# Altium PCB XEM7310_Berakout.PcbDoc (part 3 of 3)
Units mil, origin at the board's own origin, x right, y up, seen from the top; angles counter-clockwise.
Board outline 5980 x 6510 mil, 4 copper layers (Top, Ground Plane, Power Plane, Bottom), stack 61.496 mil thick; 68 components, 204 nets, 832 pads, 382 vias.
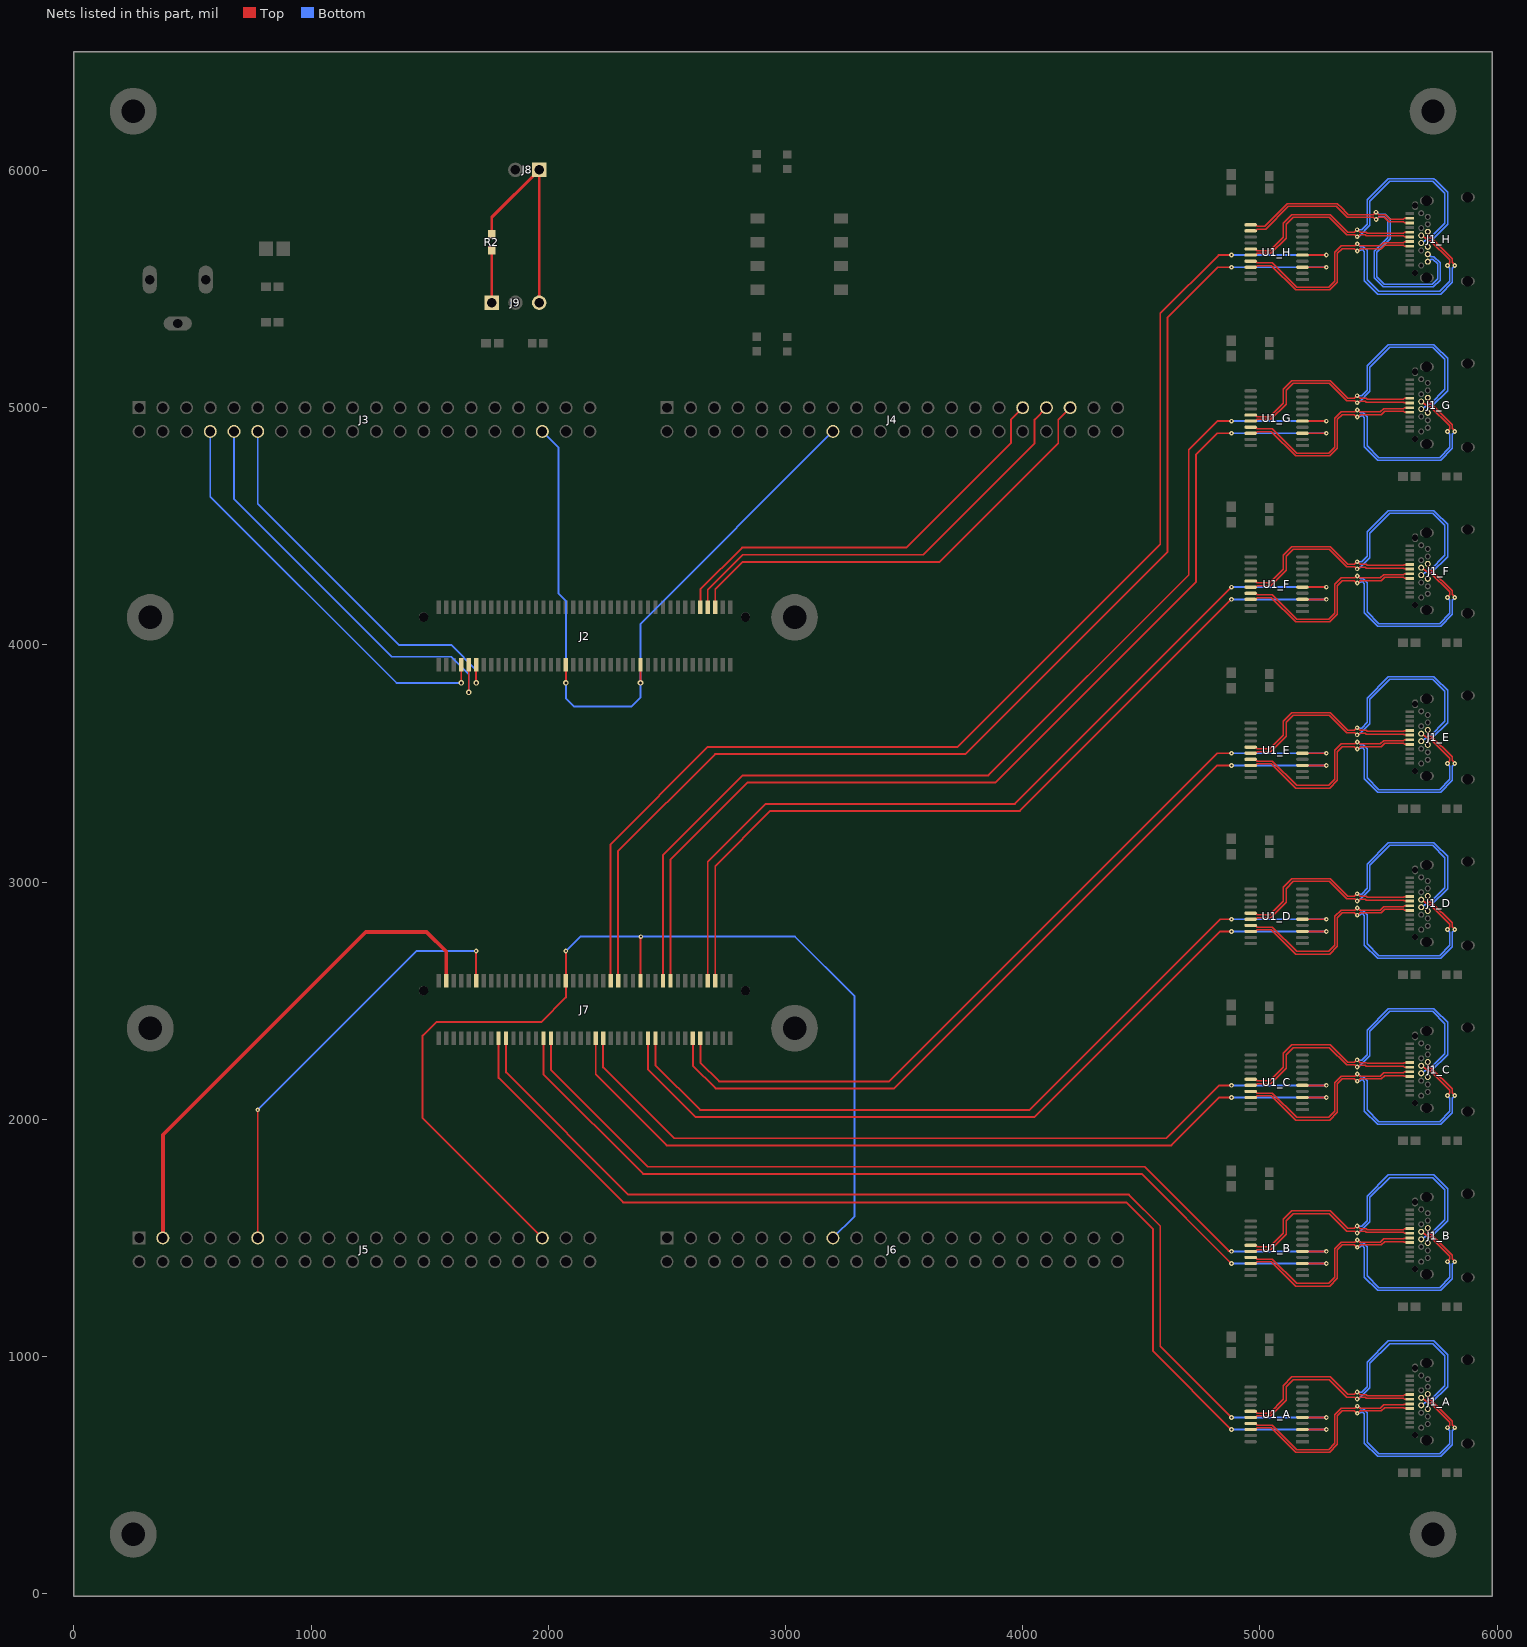
[diagram p5: the nets of this part, all layers, seen from the top]

## Via types
v1: diameter 20, hole 8, Top to Bottom, 190 vias
v2: diameter 24, hole 12, Top to Bottom, 154 vias
v3: diameter 32, hole 16, Top to Bottom, 38 vias

## Nets (pads, with @x,y where several pads share a name; then routed paths per layer and width w, separated by ;. In a path a pad name is that pad's centre, name@x,y a point inside that pad or via, vN(x,y) a via of type N, cw(c..) or ccw(c..) an arc to the next point about the centre after c; other vN are vias at no path point) (continued)
MISO_H_N: J1_H.A11 J1_H.B11 U1_H.11 | length 1487.1
  Top w6.3: U1_H.11@4960.73,5771.27 4982.63,5771.27 4989.78,5764.13 5020.19,5764.13 5115.79,5859.72 5326.69,5859.72 5333.31,5853.1 5337.99,5848.42 5372.41,5814 5477.47,5814 5487.86,5824.39 v1(5489.46,5824.39) ; v1@5490,5822.39 5493.17,5822.39 5501.51,5814.04 5528.65,5814.04 5548.3,5794.39 5605.67,5794.39 5609.24,5797.95 5631.77,5797.95 J1_H.A11@5632.4,5798.58
  Bottom w6.3: v1(5489.46,5824.39) 5491.17,5824.39 v1@5493.17,5822.39 ; v1@5489.48,5823.09 5494.04,5823.09 5501.34,5815.79 5528.1,5815.79 5549.5,5794.39 5549.5,5712.26 5493.17,5655.92 5493.17,5551.52 5524.16,5520.53 5726.6,5520.53 5748.7,5542.63 5748.7,5605.88 5728.97,5625.61 5722.89,5625.61 5712.8,5615.51 J1_H.B11@5707.6,5615.51
MISO_H_P: J1_H.A10 J1_H.B10 U1_H.12 | length 1520.6
  Top w6.3: U1_H.12@4960.73,5745.68 4982.63,5745.68 4989.78,5752.83 5024.87,5752.83 5120.47,5848.42 5322.01,5848.42 5367.73,5802.7 5478.41,5802.7 5487.21,5793.9 v1(5490.11,5793.9) ; v1@5490.2,5794.39 5493.17,5794.39 5501.51,5802.74 5523.96,5802.74 5543.62,5783.09 5605.67,5783.09 5609.24,5779.53 5631.77,5779.53 J1_H.A10@5632.4,5778.9
  Bottom w6.3: v1(5490.11,5793.9) 5491.71,5793.9 5502.3,5804.49 5523.42,5804.49 5538.2,5789.71 5538.2,5716.94 5481.86,5660.6 5481.86,5546.84 5519.47,5509.23 5731.28,5509.23 5760,5537.95 5760,5610.56 5733.65,5636.91 5722.89,5636.91 5712.8,5647.01 J1_H.B10@5707.6,5647.01
MOSI_A: J7.20 U1_A.5 | length 4601.3
  Top w8: J7.20@1821.93,2341.02 1821.93,2198.07 2337.01,1682.99 4447.24,1682.99 4580,1550.24 4580,1043.32 v1(4880,743.32) ; U1_A.5@5179.27,743.32 v1(5280,743.32)
  Bottom w8: v1(4880,743.32) v1(5280,743.32)
MOSI_A_N: J1_A.A8 J1_A.B8 U1_A.15 | length 1641.2
  Top w6.3: U1_A.15@4960.73,768.91 4982.63,768.91 4989.78,761.77 5041.12,761.77 5098.7,819.35 5098.7,877.67 5135.07,914.04 5297.54,914.04 5371.28,840.3 5396.83,840.3 5407.29,850.76 5412.77,850.76 5424.03,839.49 5448.65,839.49 5452.8,835.34 5605.67,835.34 5609.24,838.9 5631.77,838.9 J1_A.A8@5632.4,839.53
  Bottom w6.3: v1(5410,850.76) 5411.15,849.6 5428.45,849.6 5452.01,873.15 5452.01,976.13 5541.86,1065.99 5733.65,1065.99 5741.64,1057.99 5791.3,1008.33 5791.3,872.52 5723.03,804.25 5713.77,804.25 5706.59,797.06 5706.59,779.51 J1_A.B8@5707.6,778.5
MOSI_A_P: J1_A.A7 J1_A.B7 U1_A.16 | length 1621.5
  Top w6.3: U1_A.16@4960.73,743.32 4982.63,743.32 4989.78,750.46 5045.8,750.46 5110,814.66 5110,872.99 5139.75,902.74 5292.86,902.74 5366.6,829 5399.01,829 5407.26,820.76 5413.73,820.76 5419.16,826.18 5419.51,826.18 5421.51,828.19 5443.96,828.19 5448.12,824.03 5605.67,824.03 5609.24,820.47 5631.77,820.47 J1_A.A7@5632.4,819.84
  Bottom w6.3: v1(5410.03,820.76) 5413.73,820.76 5418.67,825.69 5420.53,825.69 5463.31,868.47 5463.31,971.45 5546.54,1054.68 5728.97,1054.68 5780,1003.65 5780,877.2 5718.35,815.55 5709.09,815.55 5697.99,804.45 5695.46,804.45 5685.26,794.25 J1_A.B7@5680.04,794.25
MOSI_B: J7.32 U1_B.5 | length 3819
  Top w8: J7.32@2010.91,2341.02 2010.91,2209.09 2420,1800 4513.9,1800 4868.28,1445.62 4877.7,1445.62 v1(4880,1443.32) ; U1_B.5@5179.27,1443.32 v1(5280,1443.32)
  Bottom w8: v1(4880,1443.32) v1(5280,1443.32)
MOSI_B_N: J1_B.A8 J1_B.B8 U1_B.15 | length 1641.2
  Top w6.3: U1_B.15@4960.73,1468.91 4982.63,1468.91 4989.78,1461.77 5041.12,1461.77 5098.7,1519.35 5098.7,1577.67 5135.07,1614.04 5297.54,1614.04 5371.28,1540.3 5396.83,1540.3 5407.29,1550.76 5412.77,1550.76 5424.03,1539.49 5448.65,1539.49 5452.8,1535.34 5605.67,1535.34 5609.24,1538.9 5631.77,1538.9 J1_B.A8@5632.4,1539.53
  Bottom w6.3: v1(5410,1550.76) 5411.15,1549.6 5428.45,1549.6 5452.01,1573.15 5452.01,1676.13 5541.86,1765.99 5733.65,1765.99 5741.64,1757.99 5791.3,1708.33 5791.3,1572.52 5723.03,1504.25 5713.77,1504.25 5706.59,1497.06 5706.59,1479.51 J1_B.B8@5707.6,1478.5
MOSI_B_P: J1_B.A7 J1_B.B7 U1_B.16 | length 1621.5
  Top w6.3: U1_B.16@4960.73,1443.32 4982.63,1443.32 4989.78,1450.46 5045.8,1450.46 5110,1514.66 5110,1572.99 5139.75,1602.74 5292.86,1602.74 5366.6,1529 5399.01,1529 5407.26,1520.76 5413.73,1520.76 5419.16,1526.18 5419.51,1526.18 5421.51,1528.19 5443.96,1528.19 5448.12,1524.03 5605.67,1524.03 5609.24,1520.47 5631.77,1520.47 J1_B.A7@5632.4,1519.84
  Bottom w6.3: v1(5410.03,1520.76) 5413.73,1520.76 5418.67,1525.69 5420.53,1525.69 5463.31,1568.47 5463.31,1671.45 5546.54,1754.68 5728.97,1754.68 5780,1703.65 5780,1577.2 5718.35,1515.55 5709.09,1515.55 5697.99,1504.45 5695.46,1504.45 5685.26,1494.25 J1_B.B7@5680.04,1494.25
MOSI_C: J7.46 U1_C.5 | length 3488
  Top w8: J7.46@2231.38,2341.02 2231.38,2218.62 2530,1920 4605.73,1920 4829.05,2143.32 v1(4880,2143.32) ; U1_C.5@5179.27,2143.32 v1(5280,2143.32)
  Bottom w8: v1(4880,2143.32) v1(5280,2143.32)
MOSI_C_N: J1_C.A8 J1_C.B8 U1_C.15 | length 1641.2
  Top w6.3: U1_C.15@4960.73,2168.91 4982.63,2168.91 4989.78,2161.77 5041.12,2161.77 5098.7,2219.35 5098.7,2277.67 5135.07,2314.04 5297.54,2314.04 5371.28,2240.3 5396.83,2240.3 5407.29,2250.76 5412.77,2250.76 5424.03,2239.49 5448.65,2239.49 5452.8,2235.34 5605.67,2235.34 5609.24,2238.9 5631.77,2238.9 J1_C.A8@5632.4,2239.53
  Bottom w6.3: v1(5410,2250.76) 5411.15,2249.6 5428.45,2249.6 5452.01,2273.15 5452.01,2376.13 5541.86,2465.99 5733.65,2465.99 5741.64,2457.99 5791.3,2408.33 5791.3,2272.52 5723.03,2204.25 5713.77,2204.25 5706.59,2197.06 5706.59,2179.51 J1_C.B8@5707.6,2178.5
MOSI_C_P: J1_C.A7 J1_C.B7 U1_C.16 | length 1621.5
  Top w6.3: U1_C.16@4960.73,2143.32 4982.63,2143.32 4989.78,2150.46 5045.8,2150.46 5110,2214.66 5110,2272.99 5139.75,2302.74 5292.86,2302.74 5366.6,2229 5399.01,2229 5407.26,2220.76 5413.73,2220.76 5419.16,2226.18 5419.51,2226.18 5421.51,2228.19 5443.96,2228.19 5448.12,2224.03 5605.67,2224.03 5609.24,2220.47 5631.77,2220.47 J1_C.A7@5632.4,2219.84
  Bottom w6.3: v1(5410.03,2220.76) 5413.73,2220.76 5418.67,2225.69 5420.53,2225.69 5463.31,2268.47 5463.31,2371.45 5546.54,2454.68 5728.97,2454.68 5780,2403.65 5780,2277.2 5718.35,2215.55 5709.09,2215.55 5697.99,2204.45 5695.46,2204.45 5685.26,2194.25 J1_C.B7@5680.04,2194.25
MOSI_D: J7.60 U1_D.5 | length 3452.4
  Top w8: J7.60@2451.85,2341.02 2451.85,2228.15 2640,2040 4028.78,2040 4832.1,2843.32 v1(4880,2843.32) ; U1_D.5@5179.27,2843.32 v1(5280,2843.32)
  Bottom w8: v1(4880,2843.32) v1(5280,2843.32)
MOSI_D_N: J1_D.A8 J1_D.B8 U1_D.15 | length 1641.2
  Top w6.3: U1_D.15@4960.73,2868.91 4982.63,2868.91 4989.78,2861.77 5041.12,2861.77 5098.7,2919.35 5098.7,2977.67 5135.07,3014.04 5297.54,3014.04 5371.28,2940.3 5396.83,2940.3 5407.29,2950.76 5412.77,2950.76 5424.03,2939.49 5448.65,2939.49 5452.8,2935.34 5605.67,2935.34 5609.24,2938.9 5631.77,2938.9 J1_D.A8@5632.4,2939.53
  Bottom w6.3: v1(5410,2950.76) 5411.15,2949.6 5428.45,2949.6 5452.01,2973.15 5452.01,3076.13 5541.86,3165.99 5733.65,3165.99 5741.64,3157.99 5791.3,3108.33 5791.3,2972.52 5723.03,2904.25 5713.77,2904.25 5706.59,2897.06 5706.59,2879.51 J1_D.B8@5707.6,2878.5
MOSI_D_P: J1_D.A7 J1_D.B7 U1_D.16 | length 1621.5
  Top w6.3: U1_D.16@4960.73,2843.32 4982.63,2843.32 4989.78,2850.46 5045.8,2850.46 5110,2914.66 5110,2972.99 5139.75,3002.74 5292.86,3002.74 5366.6,2929 5399.01,2929 5407.26,2920.76 5413.73,2920.76 5419.16,2926.18 5419.51,2926.18 5421.51,2928.19 5443.96,2928.19 5448.12,2924.03 5605.67,2924.03 5609.24,2920.47 5631.77,2920.47 J1_D.A7@5632.4,2919.84
  Bottom w6.3: v1(5410.03,2920.76) 5413.73,2920.76 5418.67,2925.69 5420.53,2925.69 5463.31,2968.47 5463.31,3071.45 5546.54,3154.68 5728.97,3154.68 5780,3103.65 5780,2977.2 5718.35,2915.55 5709.09,2915.55 5697.99,2904.45 5695.46,2904.45 5685.26,2894.25 J1_D.B7@5680.04,2894.25
MOSI_E: J7.72 U1_E.5 | length 3447.5
  Top w8: J7.72@2640.83,2341.02 2640.83,2239.17 2720,2160 3436.8,2160 4820.12,3543.32 v1(4880,3543.32) ; U1_E.5@5179.27,3543.32 v1(5280,3543.32)
  Bottom w8: v1(4880,3543.32) v1(5280,3543.32)
MOSI_E_N: J1_E.A8 J1_E.B8 U1_E.15 | length 1641.2
  Top w6.3: U1_E.15@4960.73,3568.91 4982.63,3568.91 4989.78,3561.77 5041.12,3561.77 5098.7,3619.35 5098.7,3677.67 5135.07,3714.04 5297.54,3714.04 5371.28,3640.3 5396.83,3640.3 5407.29,3650.76 5412.77,3650.76 5424.03,3639.49 5448.65,3639.49 5452.8,3635.34 5605.67,3635.34 5609.24,3638.9 5631.77,3638.9 J1_E.A8@5632.4,3639.53
  Bottom w6.3: v1(5410,3650.76) 5411.15,3649.6 5428.45,3649.6 5452.01,3673.15 5452.01,3776.13 5541.86,3865.99 5733.65,3865.99 5741.64,3857.99 5791.3,3808.33 5791.3,3672.52 5723.03,3604.25 5713.77,3604.25 5706.59,3597.06 5706.59,3579.51 J1_E.B8@5707.6,3578.5
MOSI_E_P: J1_E.A7 J1_E.B7 U1_E.16 | length 1621.5
  Top w6.3: U1_E.16@4960.73,3543.32 4982.63,3543.32 4989.78,3550.46 5045.8,3550.46 5110,3614.66 5110,3672.99 5139.75,3702.74 5292.86,3702.74 5366.6,3629 5399.01,3629 5407.26,3620.76 5413.73,3620.76 5419.16,3626.18 5419.51,3626.18 5421.51,3628.19 5443.96,3628.19 5448.12,3624.03 5605.67,3624.03 5609.24,3620.47 5631.77,3620.47 J1_E.A7@5632.4,3619.84
  Bottom w6.3: v1(5410.03,3620.76) 5413.73,3620.76 5418.67,3625.69 5420.53,3625.69 5463.31,3668.47 5463.31,3771.45 5546.54,3854.68 5728.97,3854.68 5780,3803.65 5780,3677.2 5718.35,3615.55 5709.09,3615.55 5697.99,3604.45 5695.46,3604.45 5685.26,3594.25 J1_E.B7@5680.04,3594.25
MOSI_F: J7.73 U1_F.5 | length 3689.6
  Top w8: J7.73@2672.32,2584.02 2672.32,3085.67 2916.65,3330 3966.68,3330 v1(4880,4243.32) ; U1_F.5@5179.27,4243.32 v1(5280,4243.32)
  Bottom w8: v1(4880,4243.32) v1(5280,4243.32)
MOSI_F_N: J1_F.A8 J1_F.B8 U1_F.15 | length 1641.2
  Top w6.3: U1_F.15@4960.73,4268.91 4982.63,4268.91 4989.78,4261.77 5041.12,4261.77 5098.7,4319.35 5098.7,4377.67 5135.07,4414.04 5297.54,4414.04 5371.28,4340.3 5396.83,4340.3 5407.29,4350.76 5412.77,4350.76 5424.03,4339.49 5448.65,4339.49 5452.8,4335.34 5605.67,4335.34 5609.24,4338.9 5631.77,4338.9 J1_F.A8@5632.4,4339.53
  Bottom w6.3: v1(5410,4350.76) 5411.15,4349.6 5428.45,4349.6 5452.01,4373.15 5452.01,4476.13 5541.86,4565.99 5733.65,4565.99 5741.64,4557.99 5791.3,4508.33 5791.3,4372.52 5723.03,4304.25 5713.77,4304.25 5706.59,4297.06 5706.59,4279.51 J1_F.B8@5707.6,4278.5
MOSI_F_P: J1_F.A7 J1_F.B7 U1_F.16 | length 1621.5
  Top w6.3: U1_F.16@4960.73,4243.32 4982.63,4243.32 4989.78,4250.46 5045.8,4250.46 5110,4314.66 5110,4372.99 5139.75,4402.74 5292.86,4402.74 5366.6,4329 5399.01,4329 5407.26,4320.76 5413.73,4320.76 5419.16,4326.18 5419.51,4326.18 5421.51,4328.19 5443.96,4328.19 5448.12,4324.03 5605.67,4324.03 5609.24,4320.47 5631.77,4320.47 J1_F.A7@5632.4,4319.84
  Bottom w6.3: v1(5410.03,4320.76) 5413.73,4320.76 5418.67,4325.69 5420.53,4325.69 5463.31,4368.47 5463.31,4471.45 5546.54,4554.68 5728.97,4554.68 5780,4503.65 5780,4377.2 5718.35,4315.55 5709.09,4315.55 5697.99,4304.45 5695.46,4304.45 5685.26,4294.25 J1_F.B7@5680.04,4294.25
MOSI_G: J7.61 U1_G.5 | length 4493.9
  Top w8: J7.61@2483.35,2584.02 2483.35,3113.35 2820,3450 3855.24,3450 4700,4294.76 4700,4822.51 4820.81,4943.32 v1(4880,4943.32) ; U1_G.5@5179.27,4943.32 v1(5280,4943.32)
  Bottom w8: v1(4880,4943.32) v1(5280,4943.32)
MOSI_G_N: J1_G.A8 J1_G.B8 U1_G.15 | length 1641.2
  Top w6.3: U1_G.15@4960.73,4968.91 4982.63,4968.91 4989.78,4961.77 5041.12,4961.77 5098.7,5019.35 5098.7,5077.67 5135.07,5114.04 5297.54,5114.04 5371.28,5040.3 5396.83,5040.3 5407.29,5050.76 5412.77,5050.76 5424.03,5039.49 5448.65,5039.49 5452.8,5035.34 5605.67,5035.34 5609.24,5038.9 5631.77,5038.9 J1_G.A8@5632.4,5039.53
  Bottom w6.3: v1(5410,5050.76) 5411.15,5049.6 5428.45,5049.6 5452.01,5073.15 5452.01,5176.13 5541.86,5265.99 5733.65,5265.99 5741.64,5257.99 5791.3,5208.33 5791.3,5072.52 5723.03,5004.25 5713.77,5004.25 5706.59,4997.06 5706.59,4979.51 J1_G.B8@5707.6,4978.5
MOSI_G_P: J1_G.A7 J1_G.B7 U1_G.16 | length 1621.5
  Top w6.3: U1_G.16@4960.73,4943.32 4982.63,4943.32 4989.78,4950.46 5045.8,4950.46 5110,5014.66 5110,5072.99 5139.75,5102.74 5292.86,5102.74 5366.6,5029 5399.01,5029 5407.26,5020.76 5413.73,5020.76 5419.16,5026.18 5419.51,5026.18 5421.51,5028.19 5443.96,5028.19 5448.12,5024.03 5605.67,5024.03 5609.24,5020.47 5631.77,5020.47 J1_G.A7@5632.4,5019.84
  Bottom w6.3: v1(5410.03,5020.76) 5413.73,5020.76 5418.67,5025.69 5420.53,5025.69 5463.31,5068.47 5463.31,5171.45 5546.54,5254.68 5728.97,5254.68 5780,5203.65 5780,5077.2 5718.35,5015.55 5709.09,5015.55 5697.99,5004.45 5695.46,5004.45 5685.26,4994.25 J1_G.B7@5680.04,4994.25
MOSI_H: J7.47 U1_H.5 | length 5292.6
  Top w8: J7.47@2262.87,2584.02 2262.87,3159.76 2673.11,3570 3726.1,3570 4580,4423.9 4580,5397.48 4825.84,5643.32 v1(4880,5643.32) ; U1_H.5@5179.27,5643.32 v1(5280,5643.32)
  Bottom w8: v1(4880,5643.32) v1(5280,5643.32)
MOSI_H_N: J1_H.A8 J1_H.B8 U1_H.15 | length 1641.2
  Top w6.3: U1_H.15@4960.73,5668.91 4982.63,5668.91 4989.78,5661.77 5041.12,5661.77 5098.7,5719.35 5098.7,5777.67 5135.07,5814.04 5297.54,5814.04 5371.28,5740.3 5396.83,5740.3 5407.29,5750.76 5412.77,5750.76 5424.03,5739.49 5448.65,5739.49 5452.8,5735.34 5605.67,5735.34 5609.24,5738.9 5631.77,5738.9 J1_H.A8@5632.4,5739.53
  Bottom w6.3: v1(5410,5750.76) 5411.15,5749.6 5428.45,5749.6 5452.01,5773.15 5452.01,5876.13 5541.86,5965.99 5733.65,5965.99 5741.64,5957.99 5791.3,5908.33 5791.3,5772.52 5723.03,5704.25 5713.77,5704.25 5706.59,5697.06 5706.59,5679.51 J1_H.B8@5707.6,5678.5
MOSI_H_P: J1_H.A7 J1_H.B7 U1_H.16 | length 1621.5
  Top w6.3: U1_H.16@4960.73,5643.32 4982.63,5643.32 4989.78,5650.46 5045.8,5650.46 5110,5714.66 5110,5772.99 5139.75,5802.74 5292.86,5802.74 5366.6,5729 5399.01,5729 5407.26,5720.76 5413.73,5720.76 5419.16,5726.18 5419.51,5726.18 5421.51,5728.19 5443.96,5728.19 5448.12,5724.03 5605.67,5724.03 5609.24,5720.47 5631.77,5720.47 J1_H.A7@5632.4,5719.84
  Bottom w6.3: v1(5410.03,5720.76) 5413.73,5720.76 5418.67,5725.69 5420.53,5725.69 5463.31,5768.47 5463.31,5871.45 5546.54,5954.68 5728.97,5954.68 5780,5903.65 5780,5777.2 5718.35,5715.55 5709.09,5715.55 5697.99,5704.45 5695.46,5704.45 5685.26,5694.25 J1_H.B7@5680.04,5694.25
NetJ8_1: J8.1 J9.3 R2.2 | length 914.4
  Top w12: R2.2@1761.49,5731.13 1761.49,5802.67 J8.1@1961.49,6002.67 J9.3@1961.49,5442.67
NetJ9_1: J9.1 R2.1 | length 221.5
  Top w12: J9.1@1761.49,5442.67 R2.1@1761.49,5664.2
SCLK_A: J7.18 U1_A.3 | length 4671.6
  Top w8: J7.18@1790.43,2341.02 1790.43,2174.57 2315,1650 4435.57,1650 4550,1535.57 4550,1022.14 v1(4880,692.14) ; U1_A.3@5179.27,692.14 v1(5280,692.14)
  Bottom w8: v1(4880,692.14) v1(5280,692.14)
SCLK_A_N: J1_A.A6 J1_A.B6 U1_A.17 | length 1697.9
  Top w6.3: U1_A.17@4960.73,717.73 4982.63,717.73 4989.78,710.59 5052.6,710.59 5155.19,607.99 5289.55,607.99 5315.39,633.83 5315.39,755.15 5342.54,782.3 5399.03,782.3 5407.48,790.76 5413.17,790.76 5421.51,782.41 5507.87,782.41 5521.42,795.97 5605.67,795.97 5609.24,799.53 5631.77,799.53 J1_A.A6@5632.4,800.16 ; J1_A.B6@5680.04,825.75 5685.26,825.75 5695.46,815.55 5697.99,815.55 5709.09,804.45 5718.35,804.45 5799.65,723.15 5799.65,711.28 5790.98,702.6 v1(5790.98,699.95)
  Bottom w6.3: v1(5410.17,790.76) 5413.88,790.76 5425.41,779.22 5435.62,779.22 5452.01,762.83 5452.01,639.51 5501.51,590 5757.33,590 5800.5,633.17 5800.5,688.03 5790.98,697.55 v1(5790.98,699.95)
SCLK_A_P: J1_A.A5 J1_A.B5 U1_A.18 | length 1720
  Top w6.3: U1_A.18@4960.73,692.14 4982.63,692.14 4989.78,699.28 5047.92,699.28 5150.51,596.69 5294.23,596.69 5326.69,629.15 5326.69,750.46 5347.23,771 5397.18,771 5407.43,760.76 v1(5410.23,760.76) ; v1@5410.22,762.76 5414.91,762.76 5423.26,771.1 5512.55,771.1 5526.11,784.66 5605.67,784.66 5609.24,781.1 5631.77,781.1 J1_A.A5@5632.4,780.47 ; J1_A.B5@5707.6,841.5 5706.59,840.49 5706.59,822.94 5713.77,815.75 5723.03,815.75 5810.95,727.83 5810.95,712.72 5821.3,702.37 v1(5821.3,699.96)
  Bottom w6.3: v1(5410.23,760.76) 5412.85,763.38 5424.97,763.38 5427.61,766.02 5432.84,766.02 5440.7,758.15 5440.7,634.82 5496.83,578.7 5762.01,578.7 5811.8,628.49 5811.8,688.03 5821.3,697.54 v1(5821.3,699.96)
SCLK_B: J7.30 U1_B.3 | length 3882.5
  Top w8: J7.30@1979.41,2341.02 1979.41,2190.59 2400,1770 4502.14,1770 v1(4880,1392.14) ; U1_B.3@5179.27,1392.14 v1(5280,1392.14)
  Bottom w8: v1(4880,1392.14) v1(5280,1392.14)
SCLK_B_N: J1_B.A6 J1_B.B6 U1_B.17 | length 1697.9
  Top w6.3: U1_B.17@4960.73,1417.73 4982.63,1417.73 4989.78,1410.59 5052.6,1410.59 5155.19,1307.99 5289.55,1307.99 5315.39,1333.83 5315.39,1455.15 5342.54,1482.3 5399.03,1482.3 5407.48,1490.76 5413.17,1490.76 5421.51,1482.41 5507.87,1482.41 5521.42,1495.97 5605.67,1495.97 5609.24,1499.53 5631.77,1499.53 J1_B.A6@5632.4,1500.16 ; J1_B.B6@5680.04,1525.75 5685.26,1525.75 5695.46,1515.55 5697.99,1515.55 5709.09,1504.45 5718.35,1504.45 5799.65,1423.15 5799.65,1411.28 5790.98,1402.6 v1(5790.98,1399.95)
  Bottom w6.3: v1(5410.17,1490.76) 5413.88,1490.76 5425.41,1479.22 5435.62,1479.22 5452.01,1462.83 5452.01,1339.51 5501.51,1290 5757.33,1290 5800.5,1333.17 5800.5,1388.03 5790.98,1397.55 v1(5790.98,1399.95)
SCLK_B_P: J1_B.A5 J1_B.B5 U1_B.18 | length 1720
  Top w6.3: U1_B.18@4960.73,1392.14 4982.63,1392.14 4989.78,1399.28 5047.92,1399.28 5150.51,1296.69 5294.23,1296.69 5326.69,1329.15 5326.69,1450.46 5347.23,1471 5397.18,1471 5407.43,1460.76 v1(5410.23,1460.76) ; v1@5410.22,1462.76 5414.91,1462.76 5423.26,1471.1 5512.55,1471.1 5526.11,1484.66 5605.67,1484.66 5609.24,1481.1 5631.77,1481.1 J1_B.A5@5632.4,1480.47 ; J1_B.B5@5707.6,1541.5 5706.59,1540.49 5706.59,1522.94 5713.77,1515.75 5723.03,1515.75 5810.95,1427.83 5810.95,1412.72 5821.3,1402.37 v1(5821.3,1399.96)
  Bottom w6.3: v1(5410.23,1460.76) 5412.85,1463.38 5424.97,1463.38 5427.61,1466.02 5432.84,1466.02 5440.7,1458.15 5440.7,1334.82 5496.83,1278.7 5762.01,1278.7 5811.8,1328.49 5811.8,1388.03 5821.3,1397.54 v1(5821.3,1399.96)
SCLK_C: J7.44 U1_C.3 | length 3540.5
  Top w8: J7.44@2199.88,2341.02 2199.88,2188.98 2498.86,1890 4626.91,1890 4829.05,2092.14 v1(4880,2092.14) ; U1_C.3@5179.27,2092.14 v1(5280,2092.14)
  Bottom w8: v1(4880,2092.14) v1(5280,2092.14)
SCLK_C_N: J1_C.A6 J1_C.B6 U1_C.17 | length 1697.9
  Top w6.3: U1_C.17@4960.73,2117.73 4982.63,2117.73 4989.78,2110.59 5052.6,2110.59 5155.19,2007.99 5289.55,2007.99 5315.39,2033.83 5315.39,2155.15 5342.54,2182.3 5399.03,2182.3 5407.48,2190.76 5413.17,2190.76 5421.51,2182.41 5507.87,2182.41 5521.42,2195.97 5605.67,2195.97 5609.24,2199.53 5631.77,2199.53 J1_C.A6@5632.4,2200.16 ; J1_C.B6@5680.04,2225.75 5685.26,2225.75 5695.46,2215.55 5697.99,2215.55 5709.09,2204.45 5718.35,2204.45 5799.65,2123.15 5799.65,2111.28 5790.98,2102.6 v1(5790.98,2099.95)
  Bottom w6.3: v1(5410.17,2190.76) 5413.88,2190.76 5425.41,2179.22 5435.62,2179.22 5452.01,2162.83 5452.01,2039.51 5501.51,1990 5757.33,1990 5800.5,2033.17 5800.5,2088.03 5790.98,2097.55 v1(5790.98,2099.95)
SCLK_C_P: J1_C.A5 J1_C.B5 U1_C.18 | length 1720
  Top w6.3: U1_C.18@4960.73,2092.14 4982.63,2092.14 4989.78,2099.28 5047.92,2099.28 5150.51,1996.69 5294.23,1996.69 5326.69,2029.15 5326.69,2150.46 5347.23,2171 5397.18,2171 5407.43,2160.76 v1(5410.23,2160.76) ; v1@5410.22,2162.76 5414.91,2162.76 5423.26,2171.1 5512.55,2171.1 5526.11,2184.66 5605.67,2184.66 5609.24,2181.1 5631.77,2181.1 J1_C.A5@5632.4,2180.47 ; J1_C.B5@5707.6,2241.5 5706.59,2240.49 5706.59,2222.94 5713.77,2215.75 5723.03,2215.75 5810.95,2127.83 5810.95,2112.72 5821.3,2102.37 v1(5821.3,2099.96)
  Bottom w6.3: v1(5410.23,2160.76) 5412.85,2163.38 5424.97,2163.38 5427.61,2166.02 5432.84,2166.02 5440.7,2158.15 5440.7,2034.82 5496.83,1978.7 5762.01,1978.7 5811.8,2028.49 5811.8,2088.03 5821.3,2097.54 v1(5821.3,2099.96)
SCLK_D: J7.58 U1_D.3 | length 3498.4
  Top w8: J7.58@2420.35,2341.02 2420.35,2209.65 2620,2010 4049.96,2010 4832.1,2792.14 v1(4880,2792.14) ; U1_D.3@5179.27,2792.14 v1(5280,2792.14)
  Bottom w8: v1(4880,2792.14) v1(5280,2792.14)
SCLK_D_N: J1_D.A6 J1_D.B6 U1_D.17 | length 1697.9
  Top w6.3: U1_D.17@4960.73,2817.73 4982.63,2817.73 4989.78,2810.59 5052.6,2810.59 5155.19,2707.99 5289.55,2707.99 5315.39,2733.83 5315.39,2855.15 5342.54,2882.3 5399.03,2882.3 5407.48,2890.76 5413.17,2890.76 5421.51,2882.41 5507.87,2882.41 5521.42,2895.97 5605.67,2895.97 5609.24,2899.53 5631.77,2899.53 J1_D.A6@5632.4,2900.16 ; J1_D.B6@5680.04,2925.75 5685.26,2925.75 5695.46,2915.55 5697.99,2915.55 5709.09,2904.45 5718.35,2904.45 5799.65,2823.15 5799.65,2811.28 5790.98,2802.6 v1(5790.98,2799.95)
  Bottom w6.3: v1(5410.17,2890.76) 5413.88,2890.76 5425.41,2879.22 5435.62,2879.22 5452.01,2862.83 5452.01,2739.51 5501.51,2690 5757.33,2690 5800.5,2733.17 5800.5,2788.03 5790.98,2797.55 v1(5790.98,2799.95)
SCLK_D_P: J1_D.A5 J1_D.B5 U1_D.18 | length 1720
  Top w6.3: U1_D.18@4960.73,2792.14 4982.63,2792.14 4989.78,2799.28 5047.92,2799.28 5150.51,2696.69 5294.23,2696.69 5326.69,2729.15 5326.69,2850.46 5347.23,2871 5397.18,2871 5407.43,2860.76 v1(5410.23,2860.76) ; v1@5410.22,2862.76 5414.91,2862.76 5423.26,2871.1 5512.55,2871.1 5526.11,2884.66 5605.67,2884.66 5609.24,2881.1 5631.77,2881.1 J1_D.A5@5632.4,2880.47 ; J1_D.B5@5707.6,2941.5 5706.59,2940.49 5706.59,2922.94 5713.77,2915.75 5723.03,2915.75 5810.95,2827.83 5810.95,2812.72 5821.3,2802.37 v1(5821.3,2799.96)
  Bottom w6.3: v1(5410.23,2860.76) 5412.85,2863.38 5424.97,2863.38 5427.61,2866.02 5432.84,2866.02 5440.7,2858.15 5440.7,2734.82 5496.83,2678.7 5762.01,2678.7 5811.8,2728.49 5811.8,2788.03 5821.3,2797.54 v1(5821.3,2799.96)
SCLK_E: J7.70 U1_E.3 | length 3490.4
  Top w8: J7.70@2609.33,2341.02 2609.33,2225.98 2705.32,2130 3457.98,2130 4820.12,3492.14 v1(4880,3492.14) ; U1_E.3@5179.27,3492.14 v1(5280,3492.14)
  Bottom w8: v1(4880,3492.14) v1(5280,3492.14)
SCLK_E_N: J1_E.A6 J1_E.B6 U1_E.17 | length 1697.9
  Top w6.3: U1_E.17@4960.73,3517.73 4982.63,3517.73 4989.78,3510.59 5052.6,3510.59 5155.19,3407.99 5289.55,3407.99 5315.39,3433.83 5315.39,3555.15 5342.54,3582.3 5399.03,3582.3 5407.48,3590.76 5413.17,3590.76 5421.51,3582.41 5507.87,3582.41 5521.42,3595.97 5605.67,3595.97 5609.24,3599.53 5631.77,3599.53 J1_E.A6@5632.4,3600.16 ; J1_E.B6@5680.04,3625.75 5685.26,3625.75 5695.46,3615.55 5697.99,3615.55 5709.09,3604.45 5718.35,3604.45 5799.65,3523.15 5799.65,3511.28 5790.98,3502.6 v1(5790.98,3499.95)
  Bottom w6.3: v1(5410.17,3590.76) 5413.88,3590.76 5425.41,3579.22 5435.62,3579.22 5452.01,3562.83 5452.01,3439.51 5501.51,3390 5757.33,3390 5800.5,3433.17 5800.5,3488.03 5790.98,3497.55 v1(5790.98,3499.95)
SCLK_E_P: J1_E.A5 J1_E.B5 U1_E.18 | length 1720
  Top w6.3: U1_E.18@4960.73,3492.14 4982.63,3492.14 4989.78,3499.28 5047.92,3499.28 5150.51,3396.69 5294.23,3396.69 5326.69,3429.15 5326.69,3550.46 5347.23,3571 5397.18,3571 5407.43,3560.76 v1(5410.23,3560.76) ; v1@5410.22,3562.76 5414.91,3562.76 5423.26,3571.1 5512.55,3571.1 5526.11,3584.66 5605.67,3584.66 5609.24,3581.1 5631.77,3581.1 J1_E.A5@5632.4,3580.47 ; J1_E.B5@5707.6,3641.5 5706.59,3640.49 5706.59,3622.94 5713.77,3615.75 5723.03,3615.75 5810.95,3527.83 5810.95,3512.72 5821.3,3502.37 v1(5821.3,3499.96)
  Bottom w6.3: v1(5410.23,3560.76) 5412.85,3563.38 5424.97,3563.38 5427.61,3566.02 5432.84,3566.02 5440.7,3558.15 5440.7,3434.82 5496.83,3378.7 5762.01,3378.7 5811.8,3428.49 5811.8,3488.03 5821.3,3497.54 v1(5821.3,3499.96)
SCLK_F: J7.75 U1_F.3 | length 3626
  Top w8: J7.75@2703.82,2584.02 2703.82,3067.17 2936.65,3300 3987.86,3300 v1(4880,4192.14) ; U1_F.3@5179.27,4192.14 v1(5280,4192.14)
  Bottom w8: v1(4880,4192.14) v1(5280,4192.14)
SCLK_F_N: J1_F.A6 J1_F.B6 U1_F.17 | length 1697.9
  Top w6.3: U1_F.17@4960.73,4217.73 4982.63,4217.73 4989.78,4210.59 5052.6,4210.59 5155.19,4107.99 5289.55,4107.99 5315.39,4133.83 5315.39,4255.15 5342.54,4282.3 5399.03,4282.3 5407.48,4290.76 5413.17,4290.76 5421.51,4282.41 5507.87,4282.41 5521.42,4295.97 5605.67,4295.97 5609.24,4299.53 5631.77,4299.53 J1_F.A6@5632.4,4300.16 ; J1_F.B6@5680.04,4325.75 5685.26,4325.75 5695.46,4315.55 5697.99,4315.55 5709.09,4304.45 5718.35,4304.45 5799.65,4223.15 5799.65,4211.28 5790.98,4202.6 v1(5790.98,4199.95)
  Bottom w6.3: v1(5410.17,4290.76) 5413.88,4290.76 5425.41,4279.22 5435.62,4279.22 5452.01,4262.83 5452.01,4139.51 5501.51,4090 5757.33,4090 5800.5,4133.17 5800.5,4188.03 5790.98,4197.55 v1(5790.98,4199.95)
SCLK_F_P: J1_F.A5 J1_F.B5 U1_F.18 | length 1720
  Top w6.3: U1_F.18@4960.73,4192.14 4982.63,4192.14 4989.78,4199.28 5047.92,4199.28 5150.51,4096.69 5294.23,4096.69 5326.69,4129.15 5326.69,4250.46 5347.23,4271 5397.18,4271 5407.43,4260.76 v1(5410.23,4260.76) ; v1@5410.22,4262.76 5414.91,4262.76 5423.26,4271.1 5512.55,4271.1 5526.11,4284.66 5605.67,4284.66 5609.24,4281.1 5631.77,4281.1 J1_F.A5@5632.4,4280.47 ; J1_F.B5@5707.6,4341.5 5706.59,4340.49 5706.59,4322.94 5713.77,4315.75 5723.03,4315.75 5810.95,4227.83 5810.95,4212.72 5821.3,4202.37 v1(5821.3,4199.96)
  Bottom w6.3: v1(5410.23,4260.76) 5412.85,4263.38 5424.97,4263.38 5427.61,4266.02 5432.84,4266.02 5440.7,4258.15 5440.7,4134.82 5496.83,4078.7 5762.01,4078.7 5811.8,4128.49 5811.8,4188.03 5821.3,4197.54 v1(5821.3,4199.96)
SCLK_G: J7.63 U1_G.3 | length 4434.8
  Top w8: J7.63@2514.84,2584.02 2514.84,3093.35 2841.5,3420 3885.5,3420 4730,4264.5 4730,4801.33 4820.81,4892.14 v1(4880,4892.14) ; U1_G.3@5179.27,4892.14 v1(5280,4892.14)
  Bottom w8: v1(4880,4892.14) v1(5280,4892.14)
SCLK_G_N: J1_G.A6 J1_G.B6 U1_G.17 | length 1697.9
  Top w6.3: U1_G.17@4960.73,4917.73 4982.63,4917.73 4989.78,4910.59 5052.6,4910.59 5155.19,4807.99 5289.55,4807.99 5315.39,4833.83 5315.39,4955.15 5342.54,4982.3 5399.03,4982.3 5407.48,4990.76 5413.17,4990.76 5421.51,4982.41 5507.87,4982.41 5521.42,4995.97 5605.67,4995.97 5609.24,4999.53 5631.77,4999.53 J1_G.A6@5632.4,5000.16 ; J1_G.B6@5680.04,5025.75 5685.26,5025.75 5695.46,5015.55 5697.99,5015.55 5709.09,5004.45 5718.35,5004.45 5799.65,4923.15 5799.65,4911.28 5790.98,4902.6 v1(5790.98,4899.95)
  Bottom w6.3: v1(5410.17,4990.76) 5413.88,4990.76 5425.41,4979.22 5435.62,4979.22 5452.01,4962.83 5452.01,4839.51 5501.51,4790 5757.33,4790 5800.5,4833.17 5800.5,4888.03 5790.98,4897.55 v1(5790.98,4899.95)
SCLK_G_P: J1_G.A5 J1_G.B5 U1_G.18 | length 1720
  Top w6.3: U1_G.18@4960.73,4892.14 4982.63,4892.14 4989.78,4899.28 5047.92,4899.28 5150.51,4796.69 5294.23,4796.69 5326.69,4829.15 5326.69,4950.46 5347.23,4971 5397.18,4971 5407.43,4960.76 v1(5410.23,4960.76) ; v1@5410.22,4962.76 5414.91,4962.76 5423.26,4971.1 5512.55,4971.1 5526.11,4984.66 5605.67,4984.66 5609.24,4981.1 5631.77,4981.1 J1_G.A5@5632.4,4980.47 ; J1_G.B5@5707.6,5041.5 5706.59,5040.49 5706.59,5022.94 5713.77,5015.75 5723.03,5015.75 5810.95,4927.83 5810.95,4912.72 5821.3,4902.37 v1(5821.3,4899.96)
  Bottom w6.3: v1(5410.23,4960.76) 5412.85,4963.38 5424.97,4963.38 5427.61,4966.02 5432.84,4966.02 5440.7,4958.15 5440.7,4834.82 5496.83,4778.7 5762.01,4778.7 5811.8,4828.49 5811.8,4888.03 5821.3,4897.54 v1(5821.3,4899.96)
SCLK_H: J7.49 U1_H.3 | length 5232
  Top w8: J7.49@2294.37,2584.02 2294.37,3131.26 2703.11,3540 3758.49,3540 4610,4391.51 4610,5380 4822.14,5592.14 v1(4880,5592.14) ; U1_H.3@5179.27,5592.14 v1(5280,5592.14)
  Bottom w8: v1(4880,5592.14) v1(5280,5592.14)
SCLK_H_N: J1_H.A6 J1_H.B6 U1_H.17 | length 1697.9
  Top w6.3: U1_H.17@4960.73,5617.73 4982.63,5617.73 4989.78,5610.59 5052.6,5610.59 5155.19,5507.99 5289.55,5507.99 5315.39,5533.83 5315.39,5655.15 5342.54,5682.3 5399.03,5682.3 5407.48,5690.76 5413.17,5690.76 5421.51,5682.41 5507.87,5682.41 5521.42,5695.97 5605.67,5695.97 5609.24,5699.53 5631.77,5699.53 J1_H.A6@5632.4,5700.16 ; J1_H.B6@5680.04,5725.75 5685.26,5725.75 5695.46,5715.55 5697.99,5715.55 5709.09,5704.45 5718.35,5704.45 5799.65,5623.15 5799.65,5611.28 5790.98,5602.6 v1(5790.98,5599.95)
  Bottom w6.3: v1(5410.17,5690.76) 5413.88,5690.76 5425.41,5679.22 5435.62,5679.22 5452.01,5662.83 5452.01,5539.51 5501.51,5490 5757.33,5490 5800.5,5533.17 5800.5,5588.03 5790.98,5597.55 v1(5790.98,5599.95)
SCLK_H_P: J1_H.A5 J1_H.B5 U1_H.18 | length 1720
  Top w6.3: U1_H.18@4960.73,5592.14 4982.63,5592.14 4989.78,5599.28 5047.92,5599.28 5150.51,5496.69 5294.23,5496.69 5326.69,5529.15 5326.69,5650.46 5347.23,5671 5397.18,5671 5407.43,5660.76 v1(5410.23,5660.76) ; v1@5410.22,5662.76 5414.91,5662.76 5423.26,5671.1 5512.55,5671.1 5526.11,5684.66 5605.67,5684.66 5609.24,5681.1 5631.77,5681.1 J1_H.A5@5632.4,5680.47 ; J1_H.B5@5707.6,5741.5 5706.59,5740.49 5706.59,5722.94 5713.77,5715.75 5723.03,5715.75 5810.95,5627.83 5810.95,5612.72 5821.3,5602.37 v1(5821.3,5599.96)
  Bottom w6.3: v1(5410.23,5660.76) 5412.85,5663.38 5424.97,5663.38 5427.61,5666.02 5432.84,5666.02 5440.7,5658.15 5440.7,5534.82 5496.83,5478.7 5762.01,5478.7 5811.8,5528.49 5811.8,5588.03 5821.3,5597.54 v1(5821.3,5599.96)
status_led_1: J2.75 J4.35 | length 1947.1
  Top w8: J2.75@2703.82,4158.82 2703.82,4233.82 2820,4350 3650,4350 4150,4850 4150,4950 J4.35@4200,5000
status_led_2: J2.73 J4.33 | length 1877.7
  Top w8: J2.73@2672.32,4158.82 2672.32,4232.32 2820,4380 3580,4380 4050,4850 4050,4950 J4.33@4100,5000
status_led_3: J2.71 J4.31 | length 1810.1
  Top w8: J2.71@2640.83,4158.82 2640.83,4233.82 2817.01,4410 3510,4410 3950,4850 3950,4950 J4.31@4000,5000
SYS_CLK_MC1: J2.08 J3.08 | length 1733.9
  Top w8: v2(1632.95,3840) J2.08@1632.95,3915.83
  Bottom w8: J3.08@575,4900 575,4625 1360,3840 v2(1632.95,3840)
SYS_CLK_MC2: J5.11 J7.11 | length 1864.5
  Top w8: J5.11@775,1500 v1(775,2040) ; J7.11@1695.95,2584.02 v1(1695.95,2710)
  Bottom w8: v1(775,2040) 1445,2710 v1(1695.95,2710)
VBAT: J5.03 J7.03 | length 2141.6
  Top w16: J5.03@375,1500 375,1935 1230,2790 1487.15,2790 1569.96,2707.19 J7.03@1569.96,2584.02
VCCO_MC1: J2.36 J2.56 J3.36 J4.16 | length 3119.7
  Top w8: v2(2073.9,3840) J2.36@2073.9,3915.83 ; v2(2388.86,3840) J2.56@2388.86,3915.83
  Bottom w8: J3.36@1975,4900 2042.4,4832.6 2042.4,4217.6 2073.9,4186.1 v2(2073.9,3840) 2073.9,3776.1 2110,3740 2350,3740 2388.86,3778.86 v2(2388.86,3840) 2388.86,4088.86 J4.16@3200,4900
VCCO_MC2: J5.35 J6.15 J7.35 J7.55 | length 4516.1
  Top w8: J5.35@1975,1500 1470.35,2004.65 1470.35,2352.82 1527.54,2410 1970,2410 2073.9,2513.9 J7.35@2073.9,2584.02 v1(2073.9,2709.31) ; J7.55@2388.86,2584.02 2389.43,2584.59 2389.43,2769.43 v1(2390,2770)
  Bottom w8: v1(2073.9,2709.31) 2134.59,2770 v1(2390,2770) 3040,2770 3290,2520 3290,1590 J6.15@3200,1500
XADC_VN: J2.10 J3.10 | length 1772.1
  Top w8: v2(1664.45,3800) J2.10@1664.45,3915.83
  Bottom w8: J3.10@675,4900 675,4615 1340,3950 1590,3950 1664.45,3875.55 v2(1664.45,3800)
XADC_VP: J2.12 J3.12 | length 1646.2
  Top w8: v2(1695.95,3840) J2.12@1695.95,3915.83
  Bottom w8: J3.12@775,4900 775,4595 1370,4000 1590,4000 1695.95,3894.05 v2(1695.95,3840)
pads on no net: J1_A. J1_B. J1_C. J1_D. J1_E. J1_F. J1_G. J1_H. J2. J7. J10.3 U1_A.7 U1_A.13 U1_A.14 U1_B.7 U1_B.13 U1_B.14 U1_C.7 U1_C.13 U1_C.14 U1_D.7 U1_D.13 U1_D.14 U1_E.7 U1_E.13 U1_E.14 U1_F.7 U1_F.13 U1_F.14 U1_G.7 U1_G.13 U1_G.14 U1_H.7 U1_H.13 U1_H.14

## Polygon pours and split planes (outlines as drawn)
GND on Top "GND_TOP" (solid, pour order 3): 100,6400 5880,6400 5880,100 100,100
5V0 on Top "5V0_TOP" (solid, pour order 2): 1610,4110 1550,4050 660,4050 100,4610 100,6400 2130,6400 2130,5150 630,5150 530,5050 530,4980 500,4950 250,4950 220,4920 220,4855 745,4330 1550,4330 1610,4270
3V3 on Top "3V3_TOP" (solid, pour order 1): 1527.54,2370 1500,2342.46 1500,2188.98 1590,2188.98 1610,2208.98 1610,2370
GND on Bottom "GND_TOP" (solid, pour order 4): 100,6400 5880,6400 5880,100 100,100
GND on Ground Plane (split plane): 5959.9,10.1 20.1,10.1 20.1,6479.9 5959.9,6479.9
3V3 on Power Plane (split plane): 5959.9,10.1 20.1,10.1 20.1,6479.9 5959.9,6479.9

## Silkscreen, mask and mechanical layers (free items; w line width, h text height)
Top Overlay:
  rectangle: 2779.2,218.56 3287.79,521.83
  rectangle: 3680,5455 3860,5545
  rectangle: 3680,5655 3860,5745
  rectangle: 3870,5555 4050,5645
  rectangle: 3680,5755 3860,5845
  lines w10: 203.62,2265.75 3156.38,2265.75 3156.38,4234.25 203.62,4234.25 203.62,2265.75 ; 3670,5440 4060,5440 4060,5860 3670,5860 3670,5440
  text "Board" at 3448,5948 h40
  text "ON" at 3728,5910.52 h40
  text "OFF" at 3918,5910.52 h40
  text "Mode" at 3468,5875.28 h40
  text "3" at 3528,5778 h40
  text "2" at 3528,5678 h40
  text "1" at 3536,5578 h40
  text "0" at 3528,5478 h40
  text "MC1" at 2758,4261.07 h40
  text "MC2" at 2680.32,2198 h40
  text "Serial #" at 2775.98,504.98 h39.37
  text ".Project_Name" at 460.68,310 h78.74
  text ".Project_Revision" at 460.68,286.31 h40
  text "Revision" at 556.98,286.31 h40